# Allegro board sophum_camera_v1.brd
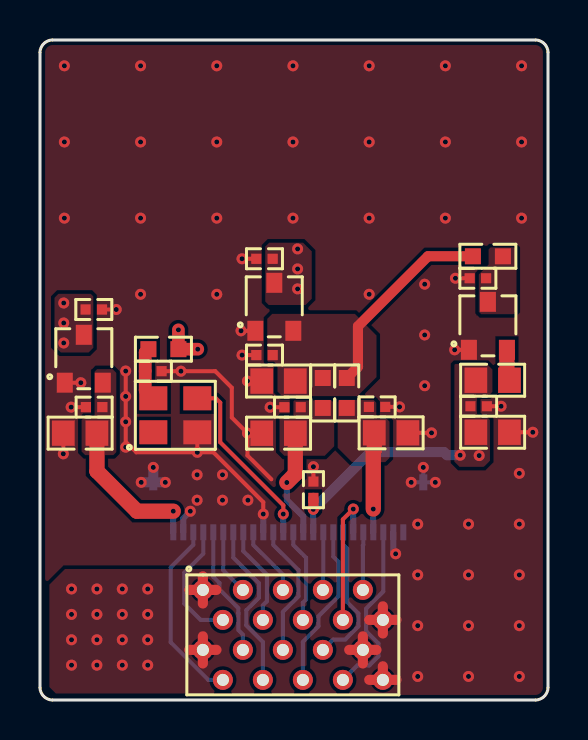
[diagram p0: board, top side]
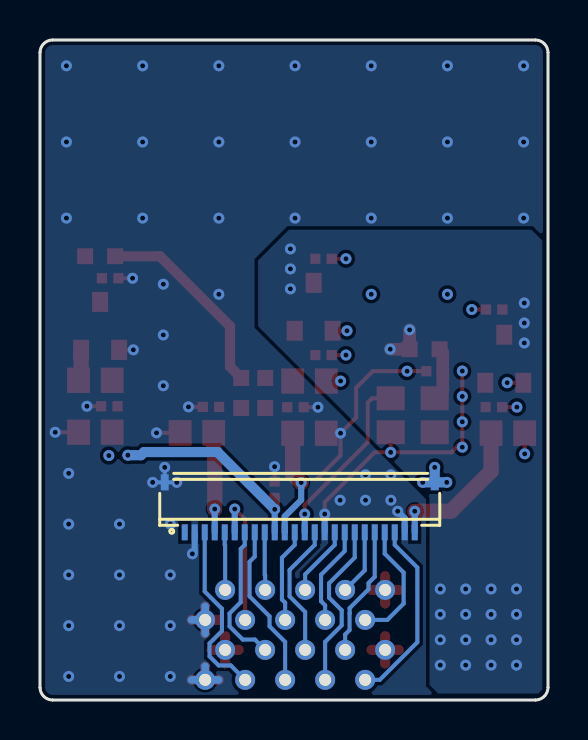
[diagram p1: board, bottom side, seen from below]

Outline 25.4 x 33.02 mm; copper layers: TOP, BOTTOM. Coordinates in mm from the lower left corner of the outline.
Outline path: 0,32.38 0,0.64 arc(0.19,0.19) 0.64,0 24.77,0 arc(25.21,0.19) 25.4,0.64 25.4,32.38 arc(25.21,32.83) 24.77,33.02 0.64,33.02 arc(0.19,32.83) 0,32.38

## Placement (name value [footprint] x y rotation side)
C1  1uF  [C0402]  13.67 10.52 90 top
C2  1uF  [C0402]  21.89 21.1 180 top
C3  10uF  [C0805]  22.63 13.4 0 top
C4  0.1uF  [C0402]  21.93 14.7 0 top
C5  0.1uF  [C0402]  5.67 16.45 0 top
C6  10uF  [C0805]  2.01 13.35 180 top
C7  0.1uF  [C0402]  2.71 14.65 180 top
C8  1uF  [C0402]  2.69 19.54 0 top
C9  1uF  [C0402]  11.22 22.07 180 top
C10  10uF  [C0805]  17.55 13.37 0 top
C11  0.1uF  [C0402]  16.85 14.67 0 top
C12  10uF  [C0805]  11.93 15.96 180 top
C13  0.1uF  [C0402]  11.23 17.26 180 top
C14  10uF  [C0805]  11.93 13.35 180 top
C15  0.1uF  [C0402]  12.63 14.65 180 top
HC1  FX5-20S-2A-DSA  [B2B-20-0R60-TM-VF]  12.14 3.26 0 top
L1  3.3uH  [L0603]  22.39 22.2 0 top
L2  FB-600R  [L0805]  22.63 16 180 top
L3  3.3uH  [L0603]  6.17 17.55 0 top
L4  3.3uH  [L0603]  15.34 15.36 270 top
L5  3.3uH  [L0603]  14.14 15.36 270 top
U1  OV-SENSOR  [FPC-24-0R80X0R30]  12.41 9.64 0 bottom
U2  XC6206P152MR  [SOT-23-3-1R00X0R80]  22.4 18.72 90 top
U3  XC6206P282MR  [SOT-23-3-1R00X0R80]  2.19 17.07 90 top
U4  XC6206P282MR  [SOT-23-3-1R00X0R80]  11.71 19.67 90 top
X1  24Mhz  [XTAL-4-3R20X2R50-SM]  6.77 14.24 0 top

## Library data of the parts
C1-C15 = CAPACITOR-NON-POL
HC1 = FX5-20S-2A-DSA
L1 L3-L5 = INDUCTOR
L2 = MAGNETIC-BEAD
U1 = OV-SENSOR
U2 = XC6206P152MR
U3 U4 = XC6206P282MR
X1 = XTAL-OSC

## Footprints (pads in the part's own frame, mm; a bottom-side part is the same pattern mirrored in y, then rotated)
B2B-20-0R60-TM-VF
  round 1 hole 0.6: 1(-4,2.25) 2(-4,-0.75) 3(-3,0.75) 4(-3,-2.25) 5(-2,2.25) 6(-2,-0.75) 7(-1,0.75) 8(-1,-2.25) 9(0,2.25) 10(0,-0.75) 11(1,0.75) 12(1,-2.25) 13(2,2.25) 14(2,-0.75) 15(3,0.75) 16(3,-2.25) 17(4,2.25) 18(4,-0.75) 19(5,0.75) 20(5,-2.25)
C0402
  rect 0.51x0.51 smd: 1(-0.41,0) 2(0.41,0)
C0805
  rect 1.14x1.27 smd: 1(-0.84,0) 2(0.84,0)
FPC-24-0R80X0R30
  rect 0.3x0.8 smd: 1(5.75,1.25) 2(5.25,1.25) 3(4.75,1.25) 4(4.25,1.25) 5(3.75,1.25) 6(3.25,1.25) 7(2.75,1.25) 8(2.25,1.25) 9(1.75,1.25) 10(1.25,1.25) 11(0.75,1.25) 12(0.25,1.25) 13(-0.25,1.25) 14(-0.75,1.25) 15(-1.25,1.25) 16(-1.75,1.25) 17(-2.25,1.25) 18(-2.75,1.25) 19(-3.25,1.25) 20(-3.75,1.25) 21(-4.25,1.25) 22(-4.75,1.25) 23(-5.25,1.25) 24(-5.75,1.25)
  rect 0.4x0.8 smd: 25(-6.75,-1.25) 26(6.75,-1.25)
L0603
  rect 0.8x0.8 smd: 1(-0.75,0) 2(0.75,0)
L0805
  rect 1.14x1.27 smd: 1(-0.84,0) 2(0.84,0)
SOT-23-3-1R00X0R80
  rect 1x0.8 smd: 1(-1.2,0.95) 2(-1.2,-0.95) 3(1.2,0)
XTAL-4-3R20X2R50-SM
  rect 1.4x1.2 smd: 1(-1.1,-0.85) 2(1.1,-0.85) 3(1.1,0.85) 4(-1.1,0.85)

## Nets
GND: C1.2 C2.2 C3.2 C4.2 C5.2 C6.2 C7.2 C8.2 C9.2 C10.2 C11.2 C12.2 C13.2 C14.2 C15.2 HC1.18 HC1.19 HC1.20 U1.2(AGND) U1.15(DGND#15) U1.23(AF-GND) U1.25(DGND#25) U1.26(DGND#26) U2.1(VSS) U3.1(VSS) U4.1(VSS) X1.2(GND)
VCC_3V3: C8.1 C9.1 HC1.1 HC1.2 L3.2 U3.3(VIN) U4.3(VIN)
OV_AF_VCC: C6.1 C7.1 U1.24(AF-VCC) U3.2(VOUT)
OV_AVDD: C10.1 C11.1 L4.2 U1.4(AVDD)
OV_DOVDD: C14.1 C15.1 L5.2 U1.11(DOVDD)
OV_VCC_1V5: C1.1 C3.1 C4.1 L2.2 U1.10(DVDD)
OV_VCC_2V8: C12.1 C13.1 L1.1 L4.1 L5.1 U4.2(VOUT)
OV_XCLK: U1.13(XCLK) X1.3(OUT)
SENSOR_OV_D0: HC1.5 U1.19(Y2)
SENSOR_OV_D1: HC1.3 U1.21(Y3)
SENSOR_OV_D2: HC1.4 U1.22(Y4)
SENSOR_OV_D3: HC1.6 U1.20(Y5)
SENSOR_OV_D4: HC1.8 U1.18(Y6)
SENSOR_OV_D5: HC1.9 U1.16(Y7)
SENSOR_OV_D6: HC1.10 U1.14(Y8)
SENSOR_OV_D7: HC1.11 U1.12(Y9)
SENSOR_OV_HREF: HC1.13 U1.9(HREF)
SENSOR_OV_PCLK: HC1.7 U1.17(PCLK)
SENSOR_OV_PWDN: HC1.12 U1.8(PWDN)
SENSOR_OV_RESET: HC1.15 U1.6(RESET)
SENSOR_OV_SCL: HC1.17 U1.5(SIO_C)
SENSOR_OV_SDA: HC1.16 U1.3(SIO_D)
SENSOR_OV_VSYNC: HC1.14 U1.7(VSYNC)
N1411122: C5.1 L3.1 X1.4(VDD)
N1411368: C2.1 L1.2 U2.3(VIN)
N1411756: L2.1 U2.2(VOUT)

Pads without a net: U1 1; X1 1

## Via types
v1: diameter 0.55, hole 0.254, TOP to BOTTOM, 109 vias

## Routing (per net, layer and track width the routed paths; a pad name or vN(x,y) marks a point on that pad's centre or on a via; arc(x,y) is an arc through that point)
GND: length 54.6
  TOP w0.203: C5.2 v1(7.05,16.45) 8.76,16.45 9.59,15.62 9.59,14.13 10.29,13.43 ; v1(7.87,12.39) 4.82,12.39 4.29,12.92 v1(4.29,13.92) v1(4.29,15.19) v1(4.29,16.46) ; v1(7.87,12.39) 8.67,12.39 11.16,9.9 v1(11.16,9.3) ; v1(7.87,12.39) X1.2 ; C15.2 v1(11.5,14.65) ; U4.1 v1(10.05,18.47) ; C2.2 v1(20.77,21.1) ; C1.2 v1(13.67,11.67) ; C3.2 v1(24.64,13.4) ; C9.2 v1(10.1,22.07) ; C12.2 v1(10.37,15.96) ; U3.1 v1(2.04,15.87) ; C14.2 v1(10.37,13.35) 10.37,12.23 11.57,11.04 ; C7.2 v1(1.56,14.65) ; C13.2 v1(10.1,17.26) ; C10.2 v1(19.58,13.37) ; C11.2 v1(17.98,14.67) ; C4.2 v1(23.06,14.7) ; C8.2 v1(3.81,19.54) ; U2.1 v1(20.73,17.52) ; C6.2 v1(1.17,12.31)
  TOP w0.508: HC1.20 17.14,1.69 ; HC1.20 16.46,1.01 ; HC1.20 17.82,1.01 ; HC1.19 16.46,4.01 ; HC1.19 17.14,4.69 ; HC1.19 17.82,4.01 ; HC1.19 17.14,3.33 ; HC1.18 16.14,3.19 ; HC1.18 16.82,2.51 ; HC1.18 15.46,2.51 ; HC1.18 16.14,1.83
  BOTTOM w0.203: U1.26 v1(19.77,10.89) ; U1.26 v1(18.56,10.89) ; U1.26 v1(19.16,11.64)
  BOTTOM w0.305: v1(7.52,9.44) 7.16,9.09 U1.23 ; U1.2 17.66,7.43 v1(17.78,7.31) ; U1.15 v1(11.16,9.3)
  BOTTOM w0.381: HC1.19 17.14,4.69 ; HC1.19 17.14,3.33 ; HC1.19 17.82,4.01 ; HC1.20 17.14,1.69 ; HC1.20 17.82,1.01 ; HC1.20 16.46,1.01
  BOTTOM w0.508: U1.25 v1(5.66,11.64) ; U1.25 v1(5.06,10.89) ; U1.25 v1(6.27,10.89)
  vias: v1(1.22,31.73) v1(1.22,27.92) v1(1.22,24.11) v1(4.29,12.65) v1(5.03,31.73) v1(5.03,27.92) v1(5.03,24.11) v1(5.03,20.3) v1(7.86,11.27) v1(7.86,10) v1(8.84,31.73) v1(8.84,27.92) v1(8.84,24.11) v1(8.84,20.3) v1(9.13,11.27) v1(9.13,10) v1(10.4,10) v1(12.65,31.73) v1(12.65,27.92) v1(12.65,24.11) v1(16.46,31.73) v1(16.46,27.92) v1(16.46,24.11) v1(16.46,20.3) v1(18.89,8.8) v1(18.89,6.26) v1(18.89,3.72) v1(18.89,1.18) v1(19.23,20.8) v1(19.23,18.26) v1(19.23,15.72) v1(20.27,31.73) v1(20.27,27.92) v1(20.27,24.11) v1(21.43,8.8) v1(21.43,6.26) v1(21.43,3.72) v1(21.43,1.18) v1(23.97,11.34) v1(23.97,8.8) v1(23.97,6.26) v1(23.97,3.72) v1(23.97,1.18) v1(24.08,31.73) v1(24.08,27.92) v1(24.08,24.11)
VCC_3V3: length 7.4
  TOP w0.508: HC1.2 8.14,1.83 ; HC1.2 8.82,2.51 ; HC1.2 8.14,3.19 ; HC1.2 7.46,2.51 ; HC1.1 8.14,4.83 ; HC1.1 7.46,5.51 ; HC1.1 8.14,6.19 ; HC1.1 8.82,5.51
  TOP w0.635: v1(7.89,17.55) L3.2 v1(6.92,18.52)
  vias: v1(1.19,19.86) v1(1.19,18.86) v1(1.19,17.86) v1(1.58,5.55) v1(1.58,4.28) v1(1.58,3.01) v1(1.58,1.74) v1(2.85,5.55) v1(2.85,4.28) v1(2.85,3.01) v1(2.85,1.74) v1(4.12,5.55) v1(4.12,4.28) v1(4.12,3.01) v1(4.12,1.74) v1(5.39,5.55) v1(5.39,4.28) v1(5.39,3.01) v1(5.39,1.74) v1(12.88,22.57) v1(12.88,21.57) v1(12.88,20.57)
OV_AF_VCC: length 7.6
  TOP w0.762: C6.1 2.85,11.45 4.85,9.45 v1(6.66,9.45)
  BOTTOM w0.305: U1.24 v1(6.66,9.45)
OV_AVDD: length 5
  TOP w0.762: v1(16.66,9.56) 16.66,12.45 16.71,12.5 C10.1
  BOTTOM w0.305: U1.4 v1(16.66,9.56)
OV_DOVDD: length 5.5
  TOP w0.762: v1(12.34,10.88) 12.77,11.31 C14.1
  BOTTOM w0.305: U1.11 13.16,9.18 12.34,10.01 v1(12.34,10.88)
OV_VCC_1V5: length 10.3
  TOP w0.508: v1(13.66,9.54) 13.67,9.55 C1.1
  BOTTOM w0.305: U1.10 v1(13.66,9.54)
  BOTTOM w0.508: v1(13.66,9.54) 16.53,12.41 20.19,12.41 20.35,12.25 v1(21.01,12.25)
  vias: v1(21.96,12.23)
OV_VCC_2V8: length 10
  TOP w0.508: L1.1 19.4,22.2 15.9,18.7 15.9,16.67 L4.1
OV_XCLK: length 9
  TOP w0.203: X1.3 8.79,15.09 9.01,14.88 9.01,12.9 12.17,9.74 12.17,9.31 v1(12.16,9.3)
  BOTTOM w0.305: U1.13 v1(12.16,9.3)
SENSOR_OV_D0: length 3.3
  BOTTOM w0.203: HC1.5 9.16,6.49 U1.19
SENSOR_OV_D1: length 6.2
  BOTTOM w0.203: U1.21 8.16,7.32 7.22,6.37 7.22,4.82 8.03,4.01 HC1.3
SENSOR_OV_D2: length 9.4
  BOTTOM w0.203: U1.22 7.66,7.76 6.53,6.63 6.53,2.89 8.41,1.01 HC1.4
SENSOR_OV_D3: length 6.5
  BOTTOM w0.203: U1.20 8.66,6.16 8.97,5.85 8.97,5.54 9.92,4.6 9.92,4.34 9.92,4.33 9.92,3.5 10.14,3.28 HC1.6
SENSOR_OV_D4: length 8.5
  BOTTOM w0.203: HC1.8 11.14,2.91 10.31,3.73 10.31,4.49 10.95,5.12 10.95,5.84 9.66,7.13 U1.18
SENSOR_OV_D5: length 3.5
  BOTTOM w0.203: HC1.9 12.14,6.28 10.66,7.76 U1.16
SENSOR_OV_D6: length 6.7
  BOTTOM w0.203: U1.14 11.66,7.76 12.92,6.5 12.92,5.19 12.14,4.41 HC1.10
SENSOR_OV_D7: length 4.7
  BOTTOM w0.203: HC1.11 13.14,4.87 13.3,5.03 13.3,7.12 12.66,7.76 U1.12
SENSOR_OV_HREF: length 2.9
  BOTTOM w0.203: HC1.13 14.14,6.24 14.16,6.26 U1.9
SENSOR_OV_PCLK: length 5
  BOTTOM w0.203: U1.17 10.16,7.45 11.35,6.27 11.35,4.94 11.14,4.74 HC1.7
SENSOR_OV_PWDN: length 8.2
  BOTTOM w0.203: HC1.12 13.14,2.91 13.92,3.69 13.92,4.19 14.92,5.19 14.92,6.92 14.66,7.17 U1.8
SENSOR_OV_RESET: length 6.9
  TOP w0.203: HC1.15 15.14,9.03 v1(15.66,9.56)
  BOTTOM w0.305: U1.6 v1(15.66,9.56)
SENSOR_OV_SCL: length 2.9
  BOTTOM w0.203: U1.5 16.16,7.76 16.14,7.74 HC1.17
SENSOR_OV_SDA: length 9.1
  BOTTOM w0.203: U1.3 17.16,5.43 16.3,4.57 16.3,3.45 16.92,2.83 16.92,2.19 16.47,1.73 15.86,1.73 HC1.16
SENSOR_OV_VSYNC: length 7.3
  BOTTOM w0.203: HC1.14 14.66,3.02 15.26,3.02 15.92,3.69 15.92,4.33 15.36,4.89 15.36,7.56 15.16,7.76 U1.7
N1411122: length 2.7
  TOP w0.635: L3.1 5.26,17.39 C5.1 5.26,15.5 X1.4
N1411756: length 1.6
  TOP w0.762: U2.2 23.35,16.12 L2.1

## Copper pours and planes (outline as drawn; the poured copper is in the pictures)
GND on TOP: 0.64,0.26 0.37,0.37 0.26,0.64 0.26,32.38 0.37,32.65 0.64,32.76 24.77,32.76 25.03,32.65 25.14,32.38 25.14,0.64 25.03,0.37 24.77,0.26
GND on BOTTOM: 0.64,0.26 0.37,0.37 0.26,0.64 0.26,32.38 0.37,32.65 0.64,32.76 24.77,32.76 25.03,32.65 25.14,32.38 25.14,0.64 25.03,0.37 24.77,0.26 ; 8 cut-outs
VCC_3V3 on TOP: 11.46,22.88 13.15,22.88 13.59,22.44 13.59,20.07 13.28,19.76 11.43,19.76 11.26,19.93 11.26,22.69
VCC_3V3 on TOP: 0.93,20.32 2.53,20.32 2.66,20.19 2.66,17.62 2.43,17.39 1.04,17.39 0.73,17.7 0.73,20.13
VCC_3V3 on TOP: 12.45,6.56 13.33,5.68 13.33,0.74 12.92,0.33 0.79,0.33 0.47,0.65 0.47,5.77 1.24,6.55 1.25,6.56
VCC_3V3 on BOTTOM: 12.96,23.53 14.5,21.99 14.5,18.7 5.92,10.12 5.92,1.44 5.92,1.44 5.92,0.76 5.48,0.32 0.49,0.32 0.28,0.53 0.28,22.98 0.83,23.53
OV_AF_VCC on TOP: 2.85,16.55 3.63,16.55 3.81,16.37 3.81,12.4 3.67,12.25 2.26,12.25 2.08,12.43 2.08,14.01 2.23,14.16 2.68,14.16 2.73,14.21 2.73,16.43
OV_AVDD on TOP: 16.68,15.01 16.81,14.87 16.81,14.15 16.9,14.07 17.33,14.07 17.48,13.93 17.48,12.12 17.26,11.9 15.6,11.9 14.89,12.61 14.89,14.91 14.99,15.01
OV_DOVDD on TOP: 14.58,14.99 14.71,14.86 14.71,12.69 14.24,12.22 12.21,12.22 11.98,12.46 11.98,14.06 12.08,14.16 12.64,14.16 12.67,14.2 12.67,14.94 12.72,14.99
OV_VCC_1V5 on TOP: 20.77,16.81 22.34,16.81 22.62,16.53 22.62,15.42 22.44,15.24 21.96,15.24 21.85,15.13 21.85,14.31 22.06,14.1 22.41,14.1 22.5,14.01 22.5,11.97 22.19,11.67 20.97,11.67 20.72,11.92 20.72,16.76
OV_VCC_2V8 on TOP: 11.61,19.32 15.74,19.32 16.83,18.24 16.83,16.16 15.87,15.2 12.11,15.2 11.87,15.44 11.87,16.75 11.7,16.92 11.41,16.92 11.36,16.97 11.36,19.07
N1411368 on TOP: 23.83,22.58 23.83,19.46 23.66,19.3 22.06,19.3 21.94,19.42 21.94,21.3 22.43,21.79 22.43,22.55 22.44,22.55 22.53,22.64 23.76,22.64

## Text on the board
NCLEGEND-1-2: FIGURE | SIZE | 10.0 | 23.62 | DRILL CHART: TOP to BOTTOM | ALL UNITS ARE IN MILS | PLATED | QTY | 109 | 20
